# Altium PCB PCB1.PcbDoc
Units mm, origin at the board's own origin, x right, y up, seen from the top; angles counter-clockwise.
Board outline 112.39 x 43.18 mm, 2 copper layers (Top Layer, Bottom Layer); 33 components, 41 nets, 115 pads, 2 vias.
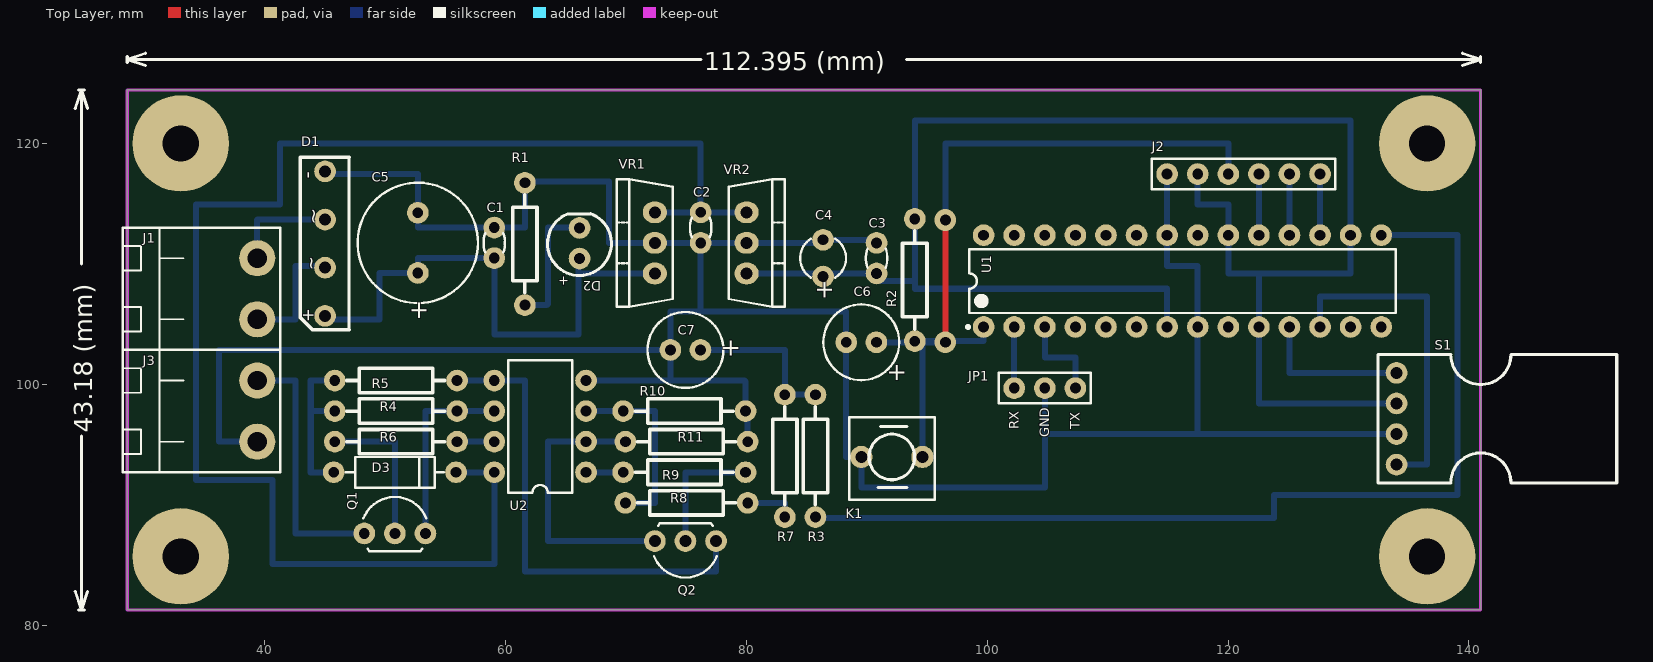
[diagram p0: Top Layer view]
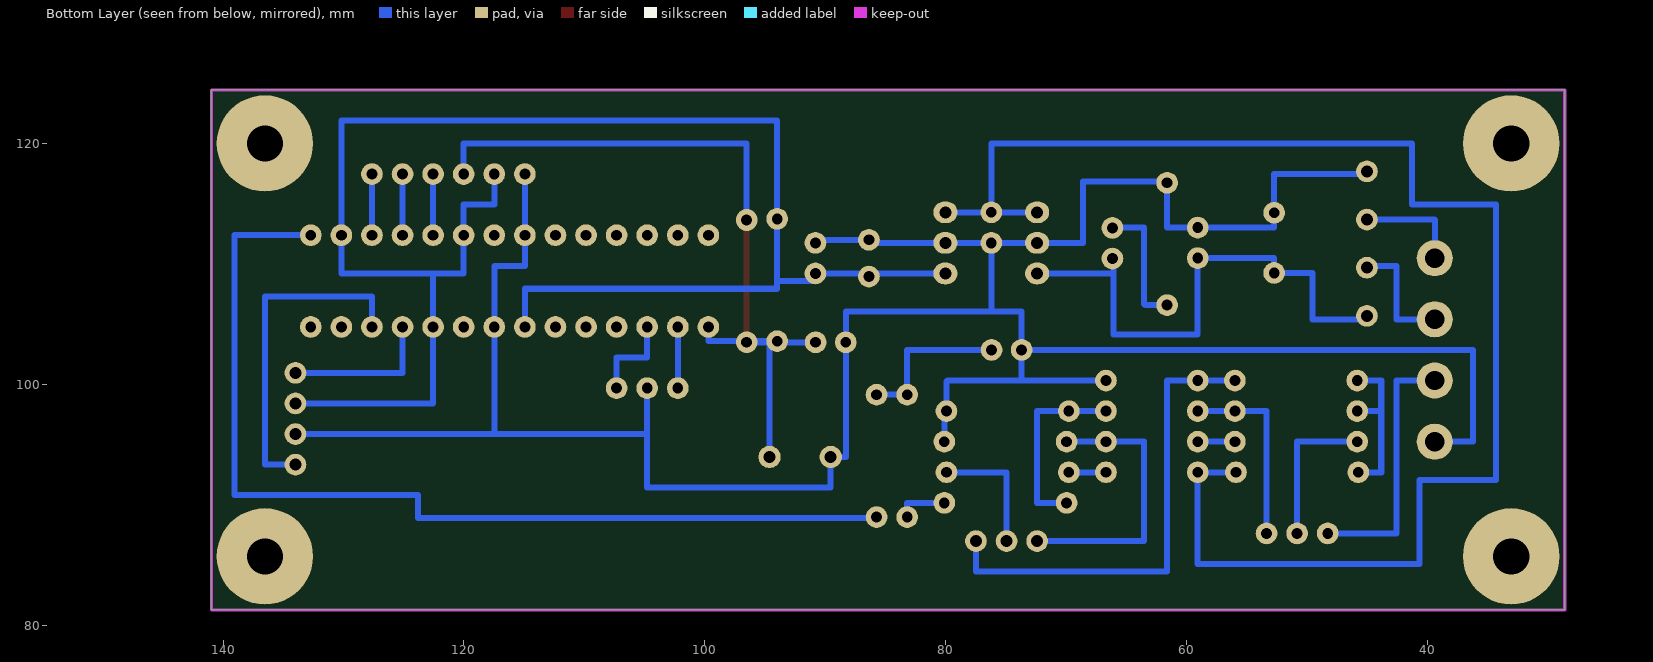
[diagram p1: Bottom Layer view, seen from below]

## Layer stack, top to bottom
Top Solder: solder mask 0.0102, Solder Resist, Dk 3.5
Top Layer: signal copper 0.0356
Dielectric 1: dielectric 0.32, FR-4, Dk 4.8
Bottom Layer: signal copper 0.0356
Bottom Solder: solder mask 0.0102, Solder Resist, Dk 3.5

## Board outline
28.575,81.28 28.575,124.46 140.97,124.46 140.97,81.28

## Design rules (kind name [scope] priority, off if disabled: settings)
Clearance [All] p1: gap=0.4
ComponentClearance [All] p1: gap=0 collisioncheckmode=3 verticalgap=0 showdistances=FALSE
Height [All] p1: minheight=0 maxheight=50 prefheight=12.7
PolygonConnect [All] p1: connectstyle=Relief reliefconductorwidth=0.254 reliefentries=4 polygonreliefangle="90 Angle" airgapwidth=0.254
RoomDefinition U_Sensor_SHT10 [InComponentClass('U_Sensor_SHT10')] p1: confinementstyle=ConfineIn formatcopy=TRUE lockcomponents=FALSE outline 0,0 50.8,0 50.8,25.4 0,25.4
RoomDefinition "U_PWM to Voltage" [InComponentClass('U_PWM to Voltage')] p2: confinementstyle=ConfineIn formatcopy=TRUE lockcomponents=FALSE outline 0,0 50.8,0 50.8,25.4 0,25.4
RoomDefinition "U_Converter_Voltage to Current_2" [InComponentClass('U_Converter_Voltage to Current_2')] p3: confinementstyle=ConfineIn formatcopy=TRUE lockcomponents=FALSE outline 0,0 50.8,0 50.8,25.4 0,25.4
RoomDefinition "U_Power Supply" [InComponentClass('U_Power Supply')] p4: confinementstyle=ConfineIn formatcopy=TRUE lockcomponents=FALSE outline 0,0 50.8,0 50.8,25.4 0,25.4
RoomDefinition U_Key_Reset [InComponentClass('U_Key_Reset')] p5: confinementstyle=ConfineIn formatcopy=TRUE lockcomponents=FALSE outline 0,0 50.8,0 50.8,25.4 0,25.4
RoomDefinition U_ATmega8_DIP [InComponentClass('U_ATmega8_DIP')] p6: confinementstyle=ConfineIn formatcopy=TRUE lockcomponents=FALSE outline 0,0 50.8,0 50.8,25.4 0,25.4
RoomDefinition Main [InComponentClass('Main')] p7: confinementstyle=ConfineIn formatcopy=TRUE lockcomponents=FALSE outline 0,0 50.8,0 50.8,25.4 0,25.4
RoomDefinition "U_Programer Connectors_SPI" [InComponentClass('U_Programer Connectors_SPI')] p8: confinementstyle=ConfineIn formatcopy=TRUE lockcomponents=FALSE outline 0,0 50.8,0 50.8,25.4 0,25.4
RoutingVias [All] p1: holewidth=0.711 width=1.27 viastyle="Through Hole" minholewidth=0.711 minwidth=1.27 maxholewidth=0.711 maxwidth=1.27
SolderMaskExpansion [All] p1: expansion=0.102
Width Width_2 [(InNet('NetJ11_3') OR InNet('NetJ11_2') OR InNet('NetJ11_1') )] p1: maxlimit=2 minlimit=2 preferedwidth=2
Width Width_1 [(InNet('NetD4_4') OR InNet('NetD4_2') OR InNet('GND') OR InNet('+12V') OR InNet('NetVR1_1') OR InNet('+5V') OR InNet('VCC') OR InNet('NetC15_1') OR InNet('GND2_U_Driver_SCR1') OR InNet('L2') OR InNet('VDD2_U_Driver_SCR1') OR InNet('GND2') OR InNet('NetD8_1') OR InNet('VDD2') OR InNet('NetD6_1') OR InNet('NetJ2_U_Driver_SCR2_2') OR InNet('NetQ1_U_Driver_SCR2_C') OR InNet('NetJ2_U_Driver_SCR1_2') OR InNet('NetQ1_U_Driver_SCR1_B') OR InNet('NetQ1_U_Driver_SCR1_C') )] p2: maxlimit=0.5 minlimit=0.5 preferedwidth=0.5
Width [All] p3: maxlimit=0.5 minlimit=0.5 preferedwidth=0.5
28 further rules are at their usual default settings.

## Classes and differential pairs
component class Main: JP1
component class "U_Converter_Voltage to Current_2": D3 J3 Q1 Q2 R4 R5 R6 R7 R8 R9 R10 R11 U2
component class U_ATmega8_DIP: U1
component class U_Key_Reset: C6 K1 R2
component class "U_Power Supply": C1 C2 C3 C4 C5 D1 D2 J1 R1 VR1 VR2
component class "U_Programer Connectors_SPI": J2
component class "U_PWM to Voltage": C7 R3
component class U_Sensor_SHT10: S1

## Components (designator, comment, footprint, x,y, rotation, side; value= is the part's Value field where it differs from the comment)
C1 "Cap" CAPNTO2.54-3.05x1.78A 59.055,111.76 r270 top
C2 "Cap" CAPNTO2.54-3.05x1.78A 76.2,113.03 r90 top
C3 "Cap" CAPNTO2.54-3.05x1.78A 90.805,110.49 r270 top
C4 "Cap Pol1" CAPPR3.05-3.81x6.35 86.36,110.49 r90 top
C5 "Cap Pol1" CAPPR5-10x12.5 52.705,111.76 r90 top
C6 "Capacitor" CAPPR2.5-6.3x5 89.535,103.505 r180 top
C7 "Capacitor" CAPPR2.5-6.3x5 74.93,102.87 r180 top
D1 "Bridge_1" KBP 45.085,111.76 r90 top
D2 "LED" LED-5mm_Red 66.04,111.76 r90 top
D3 "D Zener" DIODE-0.4 50.8,92.71 r0 top
J1 "Header 2" Fonics_2PIN_1 39.37,107.95 r270 top
J2 "Header 6" HDR1X6 127.635,117.475 r180 top
J3 "Header 2" Fonics_2PIN_1 39.37,97.79 r270 top
JP1 "Header 3" HDR1X3 107.315,99.695 r180 top
K1 "SW-PB" SPST-2_2 92.075,93.98 r0 top
Q1 "PNP" TO92C#1 50.8,87.63 r90 top
Q2 "NPN" TO92C#2 74.93,86.995 r270 top
R1 "Res1" AXIAL-0.4 61.595,110.49 r90 top
R2 "Res1" AXIAL-0.4 93.98,109.855 r270 top
R3 "Resistor" AXIAL-0.4 85.725,95.25 r270 top
R4 "Res1" AXIAL-0.4 52.07,97.79 r180 top
R5 "Res1" AXIAL-0.4 52.07,100.33 r180 top
R6 "Res1" AXIAL-0.4 52.07,95.25 r180 top
R7 "Res1" AXIAL-0.4 83.185,95.25 r270 top
R8 "Res1" AXIAL-0.4 76.2,90.17 r180 top
R9 "Res1" AXIAL-0.4 73.66,92.71 r0 top
R10 "Res1" AXIAL-0.4 73.66,97.79 r0 top
R11 "Res1" AXIAL-0.4 76.2,95.25 r180 top
S1 "Humidity and Temperature" SHT1x_1 133.985,93.345 r0 top
U1 "ATmega8-16PI" 28P3 116.205,108.585 r90 top
U2 "LM358J" 693-02 62.865,96.52 r90 top
VR1 "Volt Reg" TO220V 72.39,111.76 r90 top
VR2 "Volt Reg" TO220V 80.01,111.76 r270 top

## Footprints (in the part's own frame and the unit in brackets; to place one, negate y for a bottom-side part, rotate by r counter-clockwise, add the part's x,y. Pads: shape width x height; smd on the part's side, far side on the other; paste and mask are expansions set on the pad)
28P3 [mm] "DIP, 28-Leads, Row Spacing 7.62mm, Pitch 2.54mm, Body 34.67x7.3mm"
  round 1.8 hole 0.9: 1(-3.81,16.51) 2(-3.81,13.97) 3(-3.81,11.43) 4(-3.81,8.89) 5(-3.81,6.35) 6(-3.81,3.81) 7(-3.81,1.27) 8(-3.81,-1.27) 9(-3.81,-3.81) 10(-3.81,-6.35) 11(-3.81,-8.89) 12(-3.81,-11.43) 13(-3.81,-13.97) 14(-3.81,-16.51) 15(3.81,-16.51) 16(3.81,-13.97) 17(3.81,-11.43) 18(3.81,-8.89) 19(3.81,-6.35) 20(3.81,-3.81) 21(3.81,-1.27) 22(3.81,1.27) 23(3.81,3.81) 24(3.81,6.35) 25(3.81,8.89) 26(3.81,11.43) 27(3.81,13.97) 28(3.81,16.51)
  silkscreen extent -3.93,-17.7 2.65,17.93, body extent -3.6,-17.65 3.6,17.65, height 4.58
693-02 [mm] "DIP; 8 Leads; Row Spacing 7.62 mm; Pitch 2.54 mm"
  round 1.8 hole 0.9: 1(-3.81,-3.81) 2(-1.27,-3.81) 3(1.27,-3.81) 4(3.81,-3.81) 5(3.81,3.81) 6(1.27,3.81) 7(-1.27,3.81) 8(-3.81,3.81)
  silkscreen extent -5.5,-2.65 5.5,2.65
AXIAL-0.4 [mm]
  round 1.8 hole 0.9: 1(-3.9,0) 2(6.26,0)
  silkscreen extent -2.88,-1.02 5.24,1.02, body extent -4.19,-1.19 6.58,1.12, height 3.51
CAPNTO2.54-3.05x1.78A [mm] "Capacitor, Radial, Tantalum, Non-Polarised; Body 3.05 x 1.78 x 3.43 mm (WxTxH max); Pin Spacing 2.54 mm (typ)"
  round 1.8 hole 0.9: 1(-1.27,0) 2(1.27,0)
  silkscreen extent -0.8,-0.89 0.8,0.89
CAPPR2.5-6.3x5 [mm] "Capacitor, Electrolytic, Radial; Body 6.3 x 5 mm (Dia.xH typ); Pin Spacing 2.5 mm (typ)"
  round 1.8 hole 0.9: 1(-1.25,0) 2(1.25,0)
  silkscreen extent -3.15,-3.15 3.15,3.15
CAPPR3.05-3.81x6.35 [mm] "Capacitor, Radial, Tantalum; Body 3.81 x 6.35 mm (Dia.xH max); Pin Spacing 3.05 mm (typ)"
  round 1.8 hole 0.9: 1(-1.525,0) 2(1.525,0)
  silkscreen extent -1.62,-1.9 1.62,1.9
CAPPR5-10x12.5 [mm] "Capacitor, Electrolytic, Radial; Body 10 x 12.5 mm (Dia.xH typ); Pin Spacing 5 mm (typ)"
  round 1.8 hole 0.9: 1(-2.5,0) 2(2.5,0)
  silkscreen extent -5,-5 5,5
DIODE-0.4 [mm]
  round 1.8 hole 0.9: 1(-5.08,0) 2(5.08,0)
  silkscreen extent -4.06,-1.27 4.06,1.27
Fonics_2PIN_1 [mm]
  round 3 hole 1.6: 1(-2.54,0) 2(2.54,0)
  silkscreen extent -5.08,-11.18 5.08,1.91
HDR1X3 [mm]
  round 1.8 hole 0.9: 1(0,0) 2(2.54,0) 3(5.08,0)
  silkscreen extent -1.27,-1.27 6.35,1.27
HDR1X6 [mm]
  round 1.8 hole 0.9: 1(0,0) 2(2.54,0) 3(5.08,0) 4(7.62,0) 5(10.16,0) 6(12.7,0)
  silkscreen extent -1.27,-1.27 13.97,1.27, body extent -1.19,-1.3 14.05,1.19, height 8.54
KBP [mm]
  round 1.8 hole 1: 1(5.936,0.08) 2(-2.064,0.08) 3(-6.064,0.08) 4(1.936,0.08)
  silkscreen extent -7.22,-1.92 7.11,2.14
LED-5mm_Red [mm]
  round 1.8 hole 0.9: 1(-1.3,-0.1) 2(1.24,-0.1)
  silkscreen extent -2.71,-2.74 2.43,2.56, body extent -2.6,-2.64 2.48,2.46, height 9.6
SHT1x_1 [mm]
  round 1.8 hole 1: 1(0,0) 2(0,2.54) 3(0,5.08) 4(0,7.62)
  silkscreen extent -1.52,-1.52 18.29,9.14
SPST-2_2 [mm]
  round 1.85 hole 1: 1(-2.54,0) 2(2.54,0)
  silkscreen extent -3.56,-3.56 3.56,3.3, body extent -3,-3.2 3,3, height 4.3
TO92C#1 [mm]
  round 1.8 hole 0.9: 1(0,2.54) 2(0,0) 3(0,-2.54)
  silkscreen extent -1.48,-2.61 3.02,2.61
TO92C#2 [mm]
  round 1.8 hole 1: 1(0,2.54) 2(0,0) 3(0,-2.54)
  silkscreen extent -1.48,-2.61 3.02,2.61, body extent -1.52,-2.79 2.68,2.79, height 8
TO220V [mm]
  oval 1.8x2 hole 1: 1(-2.54,0) 2(0,0) 3(2.54,0)
  silkscreen extent -5.29,-1.48 5.29,3.18

## Part data
C1 C2 C3: "Capacitor"
C4 C5: "Polarized Capacitor (Radial)"
C6 C7: library part "Cap Pol1", "Polarized Capacitor (Radial)"
D1: "Full Wave Diode Bridge"
D2: "Typical INFRARED GaAs LED"
D3: "Zener Diode"
J1 J3: "Header, 2-Pin"
J2: "Header, 6-Pin"
JP1: "Header, 3-Pin"
K1: "Switch"
Q1: "Silicon Bipolar Transistor"
Q2: "NPN Bipolar Transistor"
R1 R2 R4 R5 R6 R7 R8 R9 R10 R11: "Resistor"
R3: library part Res1
S1: library part SHT1x
U1: "8-Bit AVR Microcontroller with 8K Bytes of In-System Programmable Flash Memory"
U2: "Dual Low-Power Operational Amplifier"
VR1 VR2: "Voltage Regulator"

## Free pads (board coordinates)
  round 8 hole 3: 0(33.02,85.725) 0(33.02,120.015) 0(136.525,85.725) 0(136.525,120.015)

## Via types
v1: diameter 1.8, hole 0.9, Top Layer to Bottom Layer, 2 vias

## Nets (pads, with @x,y where several pads share a name; then routed paths per layer and width w, separated by ;. In a path a pad name is that pad's centre, name@x,y a point inside that pad or via, vN(x,y) a via of type N, cw(c..) or ccw(c..) an arc to the next point about the centre after c; other vN are vias at no path point)
+5V: C3.2 C4.1 J2.5 R2.1 S1.3 U1.7 U1.10 U1.16 U1.20 VR2.3 | length 144.8
  Bottom Layer w0.5: VR2.3 C3.2 90.805,108.585 93.98,108.585 ; U1.7 114.935,107.95 93.98,107.95 R2.1 93.98,121.92 130.175,121.92 U1.16 130.175,109.22 122.555,109.22 ; J2.5 117.475,114.935 120.015,114.935 U1.20 120.015,109.22 122.555,109.22 ; S1.3 122.555,98.425 U1.10 122.555,109.22
+15V: C2.2 D3.2 U2.8 VR1.3 VR2.1 | length 125.7
  Bottom Layer w0.5: D3.2 U2.8 59.055,85.09 40.64,85.09 40.64,92.075 34.29,92.075 34.29,114.935 41.275,114.935 41.275,120.015 76.2,120.015 C2.2 ; VR1.3 C2.2 ; VR2.1 C2.2
GND: C1.1 C2.1 C3.1 C4.2 C5.2 C6.2 C7.2 D1.1 J2.6 J3.2 JP1.2 K1.1 R1.2 R10.2 R11.1 S1.2 U1.8 U1.22 U2.4 VR1.2 VR2.2 | length 244.7
  Bottom Layer w0.5: J3.2 36.195,95.25 36.195,102.87 C7.2 ; R1.2 61.595,113.03 C1.1 52.705,113.03 C5.2 52.705,117.475 D1.1@45.085,117.475 ; R1.2@61.685,116.84 68.58,116.84 68.58,111.76 VR1.2 C2.1 ; U2.4 73.66,100.33 ; R10.2 79.92,100.24 79.83,100.33 73.66,100.33 ; R11.1 R10.2@80.1,97.61 ; C3.1 90.55,112.015 C4.2 86.105,111.76 VR2.2 C2.1 ; 104.775,95.885 117.475,95.885 ; JP1.2 104.775,91.44 100.33,91.44 89.535,91.44 K1.1 88.265,93.98 88.265,106.045 76.2,106.045 ; J2.6 U1.22 114.935,109.855 117.475,109.855 U1.8 117.475,95.885 ; S1.2 117.475,95.885 ; D1.1@45.085,117.475 45.005,117.555 D1.1 45.085,117.616 D1.1@45.085,117.475 ; 73.66,100.33 73.68,100.35 C7.2 ; C7.2 73.68,106.045 76.2,106.045 ; 76.2,106.045 C2.1
NetC1_2: C1.2 C5.1 D1.3 D2.1 VR1.1 | length 45.6
  Bottom Layer w0.5: D1.3 45.085,105.776 45.085,105.41 49.53,105.41 49.53,109.26 C5.1 52.705,110.49 C1.2 59.055,104.14 66.04,104.14 66.04,109.22 ; D2.1 66.07,110.46 66.04,110.43 66.04,109.22 ; VR1.1 66.04,109.22
NetC6_1: C6.1 J2.4 K1.2 R2.2 U1.1 | length 64.6
  Top Layer w0.5: v1(96.52,103.505) v1(96.52,113.665)
  Bottom Layer w0.5: C6.1 R2.2@93.89,103.505 ; R2.2 R2.2@94.615,103.595 ; R2.2@94.07,103.505 v1(96.52,103.505) ; K1.2 R2.2@94.615,103.595 ; v1(96.52,113.665) 96.52,120.015 120.015,120.015 J2.4 ; U1.1 99.695,103.595 R2.2@94.615,103.595
NetC7_1: C7.1 R3.1 R7.1 | length 13.3
  Bottom Layer w0.5: C7.1 83.185,102.87 R7.1 R3.1
NetD1_2: D1.2 J1.2 | length 9.9
  Bottom Layer w0.5: J1.2 42.545,105.41 42.545,109.855 D1.2@44.846,109.855
NetD1_4: D1.4 J1.1 | length 8.8
  Bottom Layer w0.5: J1.1 39.37,113.665 39.401,113.696 D1.4
NetD2_2: D2.2 R1.1 | length 10.9
  Bottom Layer w0.5: R1.1 63.41,106.59 63.5,106.68 63.5,113.03 D2.2@66.11,113.03
NetD3_1: D3.1 R4.2 R5.2 | length 13.5
  Bottom Layer w0.5: D3.1 43.815,92.71 43.815,97.79 ; R4.2 43.815,97.79 ; R5.2 43.815,100.33 43.815,97.79
NetJ2_1: J2.1 U1.17 | length 5.1
  Bottom Layer w0.5: U1.17 J2.1
NetJ2_2: J2.2 U1.18 | length 5.1
  Bottom Layer w0.5: U1.18 J2.2
NetJ2_3: J2.3 U1.19 | length 5.1
  Bottom Layer w0.5: U1.19 J2.3
NetJ3_1: J3.1 Q1.1 | length 21.6
  Bottom Layer w0.5: J3.1 42.545,100.33 42.545,87.63 Q1.1
NetJP1_1: JP1.1 U1.3 | length 7.6
  Bottom Layer w0.5: U1.3 104.775,102.235 107.315,102.235 JP1.1
NetJP1_3: JP1.3 U1.2 | length 5.1
  Bottom Layer w0.5: JP1.3 U1.2
NetQ1_2: Q1.2 R6.2 | length 12.6
  Bottom Layer w0.5: R6.2 50.8,95.25 Q1.2
NetQ1_3: Q1.3 R4.1 U2.6 | length 19
  Bottom Layer w0.5: Q1.3 53.34,97.79 U2.6 R4.1
NetQ2_1: Q2.1 R5.1 U2.5 | length 39.9
  Bottom Layer w0.5: R5.1 U2.5 61.595,100.33 61.595,84.455 77.47,84.455 Q2.1
NetQ2_2: Q2.2 R9.2 | length 10.7
  Bottom Layer w0.5: Q2.2 74.93,92.71 R9.2
NetQ2_3: Q2.3 R11.2 U2.2 | length 23.6
  Bottom Layer w0.5: R11.2 U2.2 63.5,95.25 63.5,86.995 Q2.3
NetR3_2: R3.2 U1.15 | length 83.1
  Bottom Layer w0.5: R3.2@85.815,88.9 123.825,88.9 123.825,90.805 139.065,90.805 139.065,112.395 U1.15
NetR6_1: R6.1 U2.7 | length 3.1
  Bottom Layer w0.5: R6.1 U2.7
NetR7_2: R7.2 R8.1 | length 4.3
  Bottom Layer w0.5: R8.1 83.185,90.17 R7.2
NetR8_2: R8.2 R10.1 U2.3 | length 15.8
  Bottom Layer w0.5: U2.3 R10.1 72.39,97.79 72.39,90.17 R8.2
NetR9_1: R9.1 U2.1 | length 3.1
  Bottom Layer w0.5: U2.1 R9.1
NetS1_1: S1.1 U1.12 | length 27.9
  Bottom Layer w0.5: U1.12 127.635,107.315 136.525,107.315 136.525,93.345 S1.1
NetS1_4: S1.4 U1.11 | length 12.7
  Bottom Layer w0.5: U1.11 125.095,100.965 S1.4
NetU1_4: U1.4
NetU1_5: U1.5
NetU1_6: U1.6
NetU1_9: U1.9
NetU1_13: U1.13
NetU1_14: U1.14
NetU1_21: U1.21
NetU1_23: U1.23
NetU1_24: U1.24
NetU1_25: U1.25
NetU1_26: U1.26
NetU1_27: U1.27
NetU1_28: U1.28

## Keep-outs
Keep-Out Layer:
  the board outline again, w0.254

## Silkscreen, mask and mechanical layers (free items; w line width, h text height)
Top Overlay:
  lines w0.254: 24.257,82.804 24.765,81.28 ; 24.257,122.936 24.765,124.46 ; 24.511,81.28 25.019,81.28 ; 24.511,124.46 25.019,124.46 ; 24.765,95.735 24.765,81.28 ; 24.765,110.005 24.765,124.46 ; 25.273,82.804 24.765,81.28 ; 25.273,122.936 24.765,124.46 ; 28.575,126.746 28.575,127.254 ; 30.099,126.492 28.575,127 ; 30.099,127.508 28.575,127 ; 76.241,127 28.575,127 ; 93.304,127 140.97,127 ; 139.446,126.492 140.97,127 ; 139.446,127.508 140.97,127 ; 140.97,126.746 140.97,127.254
  text "112.395 (mm)" at 76.495,126.086 h1.52
  text "RX" at 102.616,96.266 h0.8 r90
  text "TX" at 107.696,96.266 h0.8 r90
  text "43.18 (mm)" at 25.679,95.989 h1.52 r90
  text "GND" at 105.156,95.631 h0.8 r90

## Text inside footprints (layer, text, board x,y; h text height)
C4: Top Overlay "+" at 87.11,107.015 h1.5 r90
C5: Top Overlay "+" at 53.455,105.295 h1.5 r90
C6: Top Overlay "+" at 93.345,101.6 h1.5 r180
C7: Top Overlay "+" at 79.555,103.62 h1.5 r180
D1: Top Overlay "~" at 44.323,109.474 h1 r90; Top Overlay "~" at 44.577,113.284 h1.2 r90; Top Overlay "+" at 44.069,105.156 h1 r90; Top Overlay "-" at 44.069,117.094 h1.2 r90
D2: Top Overlay "+" at 65.175,108.174 h0.8 r90